# Altium PCB PCB2.PcbDoc
Units mil, origin at the board's own origin, x right, y up, seen from the top; angles counter-clockwise.
Board outline 2625 x 3875 mil, 2 copper layers (Top Layer, Bottom Layer); 11 components, 17 nets, 64 pads, 0 vias.
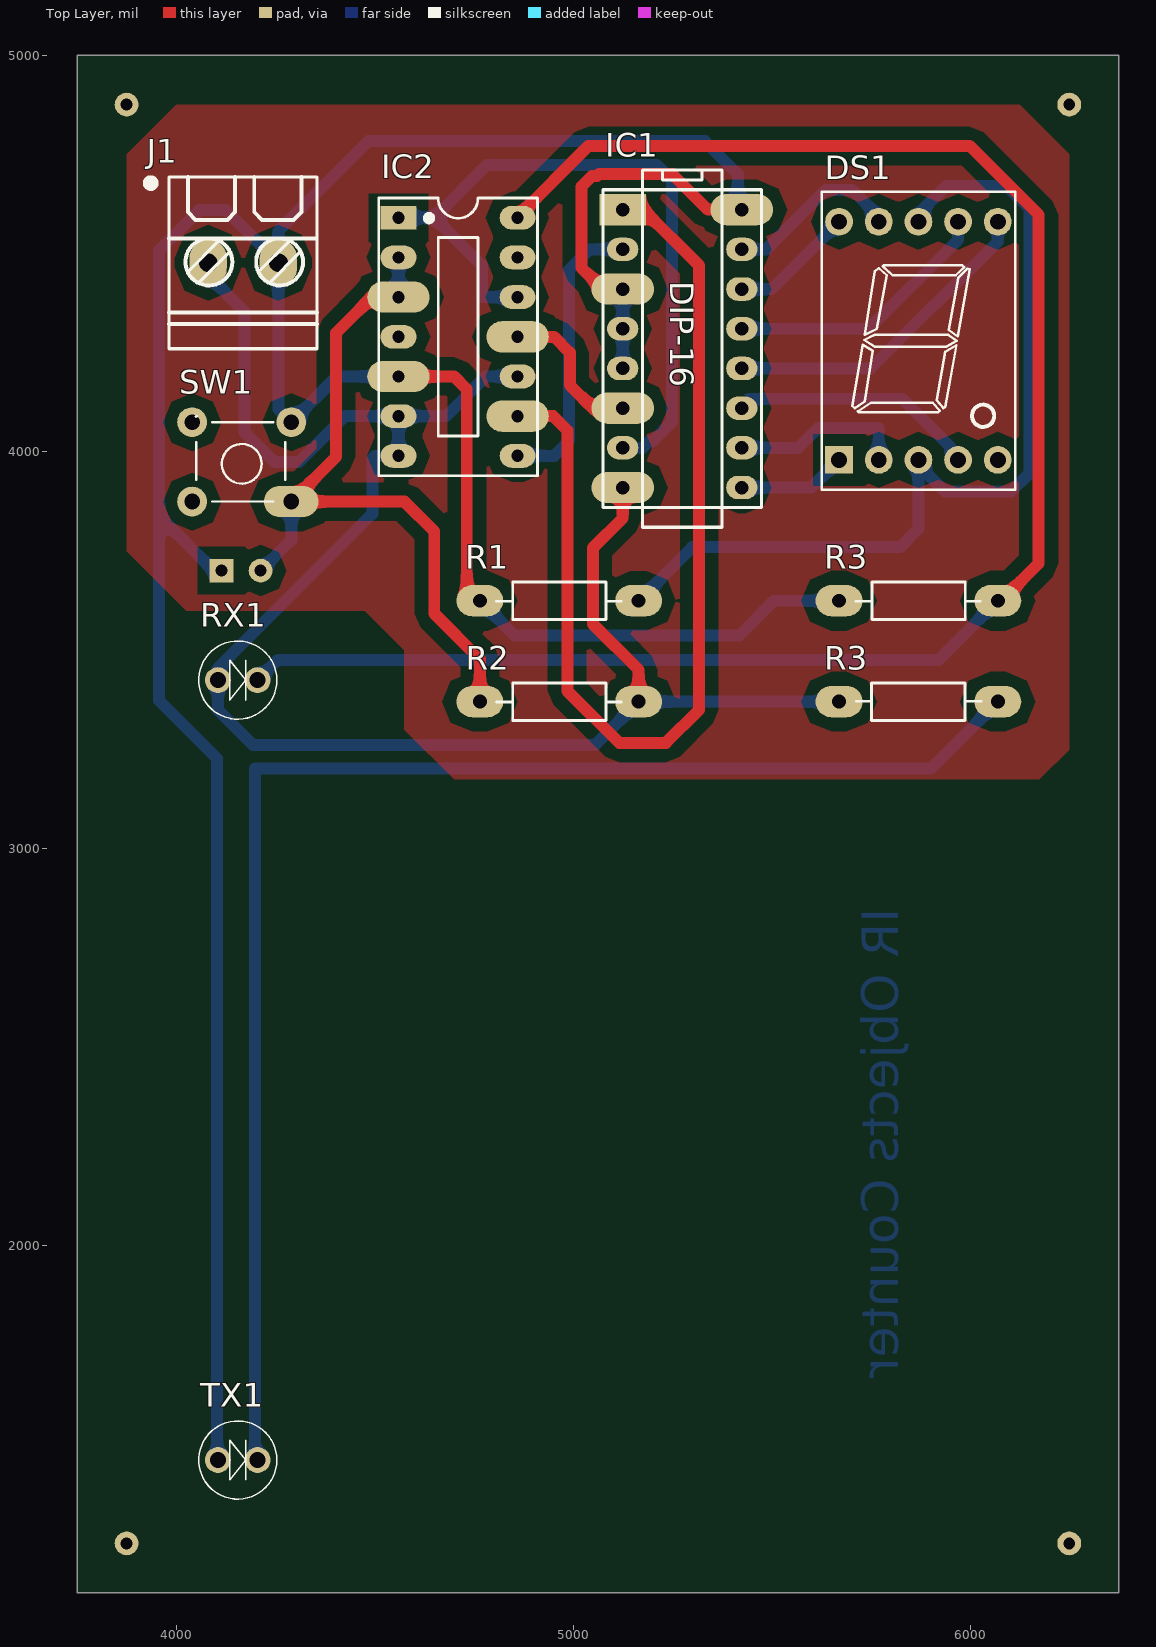
[diagram p0: Top Layer view]
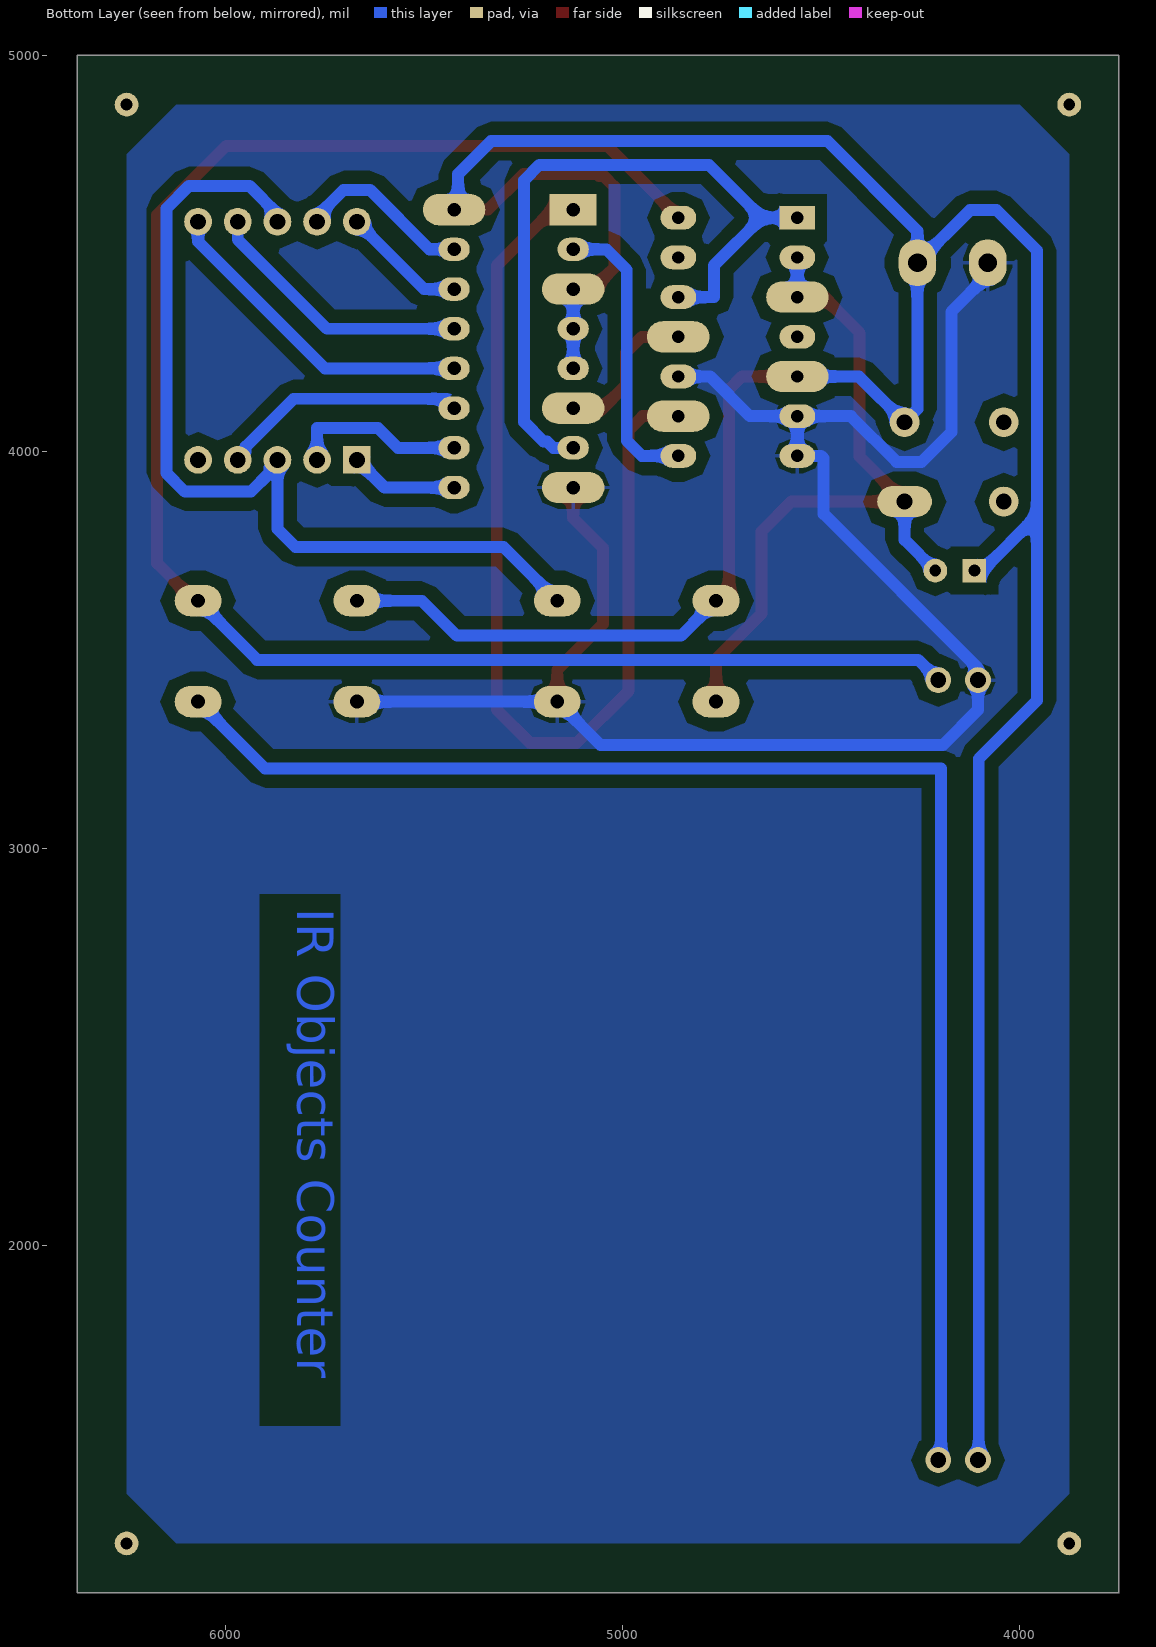
[diagram p1: Bottom Layer view, seen from below]
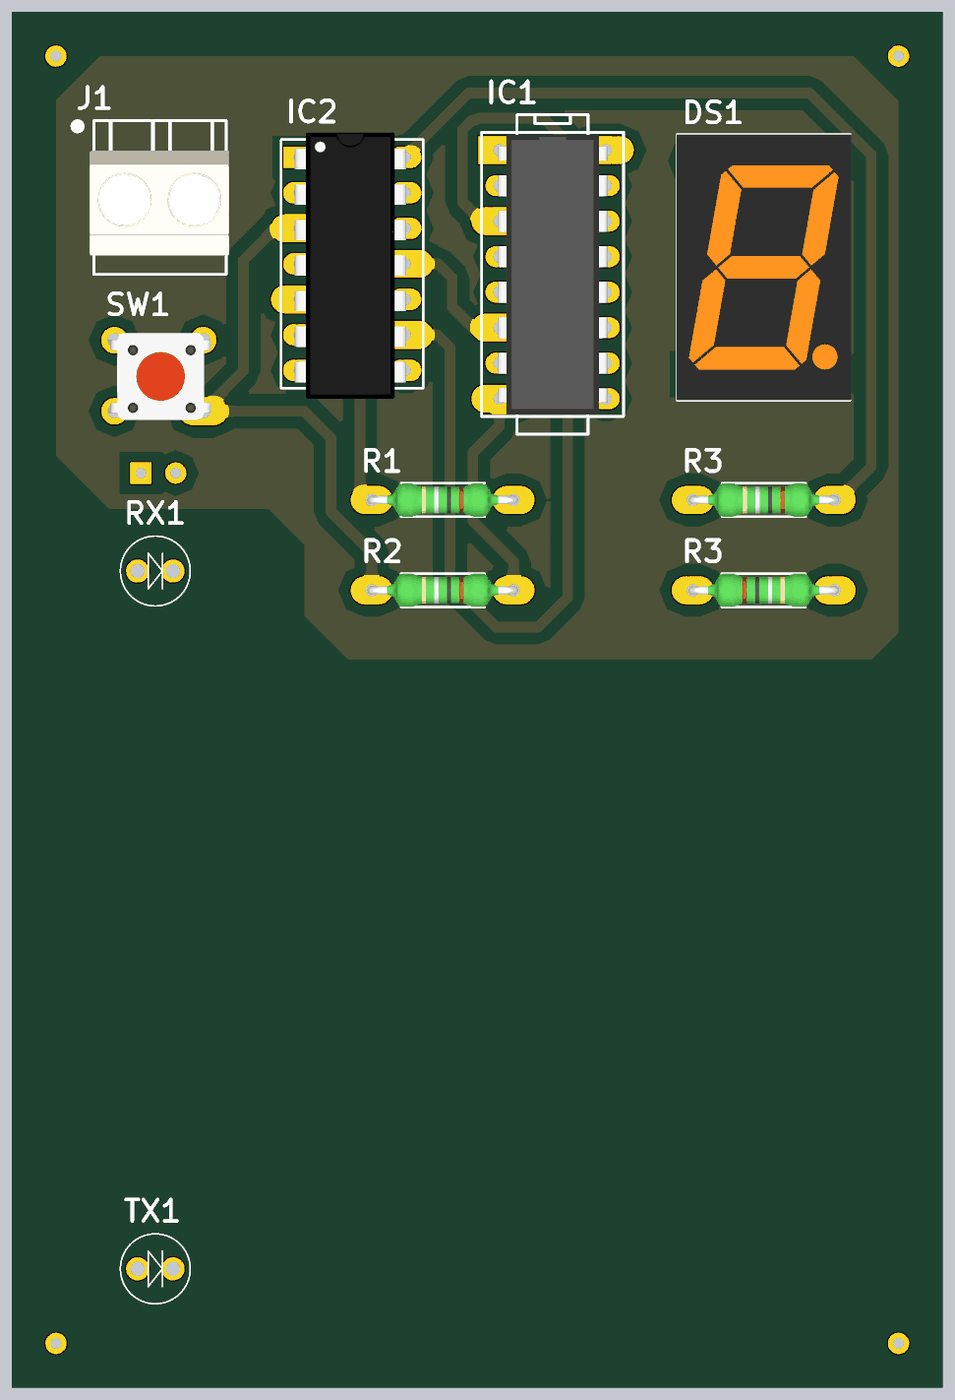
[diagram p2: 3D render of the assembled board from above, using the file's embedded part models]

## Layer stack, top to bottom
Top Solder: solder mask 0.4, Solder Resist, Dk 3.5
Top Layer: signal copper 1.4
Dielectric 1: dielectric 12.6, FR-4, Dk 4.8
Bottom Layer: signal copper 1.4
Bottom Solder: solder mask 0.4, Solder Resist, Dk 3.5

## Board outline
3750,1125 6375,1125 6375,5000 3750,5000

## Design rules (kind name [scope] priority, off if disabled: settings)
Clearance [All] p1: gap=30
PolygonConnect [All] p1: connectstyle=Relief reliefconductorwidth=10 reliefentries=4 polygonreliefangle="90 Angle" airgapwidth=10
RoutingVias [All] p1: holewidth=28 width=80 viastyle="Through Hole" minholewidth=28 minwidth=80 maxholewidth=28 maxwidth=80
SolderMaskExpansion [All] p1: expansion=4
Width [All] p1: maxlimit=30 minlimit=20 preferedwidth=30
30 further rules are at their usual default settings.

## Classes and differential pairs
component class Sheet1: DS1 IC1 IC2 J1 R1 R2 R3 RX1 SW1 TX1

## Components (designator, comment, footprint, x,y, rotation, side; value= is the part's Value field where it differs from the comment)
DS1 "7SEG" LED7SEG-1-0.56 5865,4255 r0 top
IC1 "7447" DIP16 5275,4260 r270 top
IC2 "7490" DIP14 4560,4590 r270 top
J1 "CON.Domino2" "Domino 2M" 4355,4260 r90 top
R1 "1KR" RES-1/4W 4980,3620 r0 top
R2 "1KR" RES-1/4W 4980,3365.74 r0 top
R3 "1KR" RES-1/4W 5885,3620 r0 top
R3 "100R" RES-1/4W 5855,3375.75 r180 top
RX1 "LED" LED-5MM-BLUE 4105,3425 r0 top
SW1 "SW" SW2-DIP 4290,3875 r180 top
TX1 "LED" LED-5MM-WHITE 4105,1460 r0 top

## Footprints (in the part's own frame and the unit in brackets; to place one, negate y for a bottom-side part, rotate by r counter-clockwise, add the part's x,y. Pads: shape width x height; smd on the part's side, far side on the other; paste and mask are expansions set on the pad)
DIP14 [mil] "DIP, 14-Leads, Row Spacing 7.62mm, Pitch 2.54mm, Body 19.2x6.6mm"
  rect 60x90 hole 31: 1(0,0)
  oval 60x90 hole 31: 2(100,0) 4(300,0) 6(500,0) 7(600,0) 8(600,300) 10(400,300) 12(200,300) 13(100,300) 14(0,300)
  oval 78.74x157.48 hole 31: 3(200,0) 5(400,0) 9(500,300) 11(300,300)
  silkscreen extent -50,-50 650,350, body extent -70,-12 680,302, height 145
DIP16 [mm]
  rect 2x3 hole 0.864: 1(-8.897,-3.812)
  oval 1.5x2 hole 0.864: 2(-6.357,-3.812) 4(-1.277,-3.812) 5(1.263,-3.812) 7(6.343,-3.812) 9(8.883,3.808) 10(6.343,3.808) 11(3.803,3.808) 12(1.263,3.808) 13(-1.277,3.808) 14(-3.817,3.808) 15(-6.357,3.808)
  oval 2x4 hole 0.864: 3(-3.817,-3.812) 6(3.803,-3.812) 8(8.883,-3.812) 16(-8.897,3.808)
  silkscreen extent -11.44,-5.08 11.42,5.08, body extent -10,-3.93 10,3.94, height 1.99
"Domino 2M" [mm]
  oval 3x2.4 hole 1.2: 1(5.5,6.975) 2(5.5,2.475)
  silkscreen extent 0,0 11,10.9, body extent 1.35,-0.22 8.85,9.78, height 10
LED7SEG-1-0.56 [mil]
  rect 70x70 hole 40: 1(-195,-275)
  round 70 hole 40: 2(-95,-275) 3(5,-275) 4(105,-275) 5(205,-275) 6(205,325) 7(105,325) 8(5,325) 9(-95,325) 10(-195,325)
  silkscreen extent -239,-350 249,400, body extent -241,-349 251,399, height 315
LED-5MM-BLUE [mil]
  round 65 hole 40: 1(0,0) 2(100,0)
  silkscreen extent -48,-98 148,98, body extent -54,-105 155,105, height 370
LED-5MM-WHITE [mil]
  round 65 hole 40: 1(0,0) 2(100,0)
  silkscreen extent -48,-98 148,98, body extent -54,-105 155,105, height 370
RES-1/4W [mil]
  oval 118.11x78.74 hole 35: 1(-215,5) 2(185,5)
  silkscreen extent -173,-42 141,52, body extent -227,-42 197,52, height 95
SW2-DIP [mm] "SW button 4pin, 250 x250 mil"
  oval 3.5x2 hole 1: 1(0,0)
  round 1.905 hole 1: 2(0,-5.08) 3(6.35,-5.08) 4(6.35,0)
  silkscreen extent 0.38,-5.46 6.1,0, body extent -0.9,-5.59 7,0.61, height 7

## Part data
DS1: library part LED7SEG-1, "14.2 mm General Purpose Blue 7-Segment Display: CC, RH DP, Gray Surface"
IC1: "BCD to 7-Segment Decoder/Driver"
IC2: "4-Bit Decade Counter"
J1: "2 pins Domino Header"
R1 R2 R3 R3: library part Res, "Res"
RX1 TX1: "LED Single colour Green and Red"
SW1: library part SW4, "Switch button 4 pin"

## Free pads (board coordinates)
  round 60 hole 30: 0(3875,4875) 1(3875,1250) 1(4212.6,3700.79) 2(6250,1250) 3(6250,4875)
  rect 60x60 hole 30: 0(4114.17,3700.79)

## Nets (pads, with @x,y where several pads share a name; then routed paths per layer and width w, separated by ;. In a path a pad name is that pad's centre, name@x,y a point inside that pad or via, vN(x,y) a via of type N, cw(c..) or ccw(c..) an arc to the next point about the centre after c; other vN are vias at no path point)
GND: IC1.8 IC2.6 IC2.7 IC2.10 J1.1 R2.2 R3.2@5670,3370.75 RX1.1 | length 4500.9
  Top Layer w30: IC1.8 5124.92,3833 5050,3758.08 5050,3566 5165,3451 R2.2
  Bottom Layer w30: J1.1 4080.39,4444.61 4172,4353 4172,4050 4247,3975 4310,3975 4425,4090 IC2.6 ; IC2.10 4780,4190 4680,4090 IC2.6 ; R3.2@5670,3370.75 5417.01,3370.75 R2.2 5056.26,3262 4193,3262 4105,3350 RX1.1 4105,3455 4494,3844 4494,3984 4500,3990 IC2.7 IC2.6
NetDS1_1: DS1.1 IC1.9 | length 273.9
  Bottom Layer w30: IC1.9 5600.29,3910.29 DS1.1
NetDS1_2: DS1.2 IC1.10 | length 445.7
  Bottom Layer w30: IC1.10 5566.65,4010.29 5616.36,4060 5770,4060 DS1.2
NetDS1_3: DS1.3 DS1.8 R1.2 | length 2313
  Bottom Layer w30: R1.2 5300,3760 5824,3760 5870,3806 DS1.3 5890,3960 5890,3946.86 5936.86,3900 6103.14,3900 6150,3946.86 6150,4613.14 6093.14,4670 5940,4670 5870,4600 DS1.8
NetDS1_4: DS1.4 IC1.11 | length 598.1
  Bottom Layer w30: IC1.11 5448.63,4134 5829.14,4134 5950,4013.14 DS1.4@5950,4000
NetDS1_6: DS1.6 IC1.12 | length 827.5
  Bottom Layer w30: IC1.12 5750.29,4210.29 6070,4530 DS1.6
NetDS1_7: DS1.7 IC1.13 | length 683.2
  Bottom Layer w30: IC1.13 5745.29,4310.29 5970,4535 DS1.7
NetDS1_9: DS1.9 IC1.15 | length 447.9
  Bottom Layer w30: IC1.15 5487.16,4510.29 5636.86,4660 5703.14,4660 5770,4593.14 DS1.9
NetDS1_10: DS1.10 IC1.14 | length 315.4
  Bottom Layer w30: IC1.14 5500.29,4410.29 DS1.10
NetIC1_1: IC1.1 IC2.9 | length 2587.9
  Top Layer w30: IC2.9 4950,4090 4985.34,4054.66 4985.34,3397.66 5116.32,3266.68 5233.68,3266.68 5317.34,3350.34 5317.34,4469.66 5176.71,4610.29 IC1.1
NetIC1_2: IC1.2 IC2.8 | length 732.9
  Bottom Layer w30: IC2.8 4952,3990 4990,4028 4990,4459 5041.29,4510.29 IC1.2
NetIC1_6: IC1.6 IC2.11 | length 387.2
  Top Layer w30: IC2.11 4952,4290 4992,4250 4992,4168.29 5050,4110.29 IC1.6
NetIC1_7: IC1.7 IC2.1 IC2.12 | length 1859.2
  Bottom Layer w30: IC2.1 4650,4590 ; IC2.12 4770,4390 4770,4470 4650,4590 ; IC1.7 5175,4010.29 5190.63,4025.92 5199.24,4025.92 5248.66,4075.35 5248.66,4684.34 5210,4723 4783,4723 4650,4590
NetIC2_2: IC2.2 IC2.3 pad.1@4212.6,3700.79 R2.1 SW1.1 | length 1840.3
  Top Layer w30: IC2.3 4493,4390 4403,4300 4403,3988 SW1.1 4575,3875 4650,3800 4650,3592.84 4765,3477.84 R2.1
  Bottom Layer w30: pad.1@4212.6,3700.79 4290,3778.19 SW1.1 ; IC2.3 IC2.2
NetIC2_14: IC2.14 R3.2@6070,3625 RX1.2 | length 4429.2
  Top Layer w30: IC2.14 4860,4592.29 5038.71,4771 5999,4771 6173,4597 6173,3719 6079,3625 R3.2@6070,3625
  Bottom Layer w30: RX1.2 4256,3476 5921,3476 R3.2@6070,3625
NetR3_1: R3.1@6070,3370.75 TX1.2 | length 3686.8
  Bottom Layer w30: TX1.2 4198,1467 4198,3202 5901.25,3202 R3.1@6070,3370.75
VCC: IC1.3 IC1.4 IC1.5 IC1.16 IC2.5 J1.2 pad.0@4114.17,3700.79 R1.1 R3.1@5670,3625 SW1.2 TX1.1 | length 8613.9
  Top Layer w30: IC2.5 4700,4190 4732,4158 4732,3658 R1.1 ; IC1.3 5075,4410.29 5020.87,4464.43 5020.87,4668.3 5047.23,4694.66 5059.66,4694.66 5065,4700 5250,4700 5339.71,4610.29 IC1.16
  Bottom Layer w30: 3956.69,3838.58 4094.49,3700.79 pad.0@4114.17,3700.79 ; TX1.1 4103,1462 4103,3227 3956.69,3373.31 3956.69,4507.87 4057.82,4609 4125.1,4609 J1.2 ; IC2.5 4405,4190 SW1.2 4257.56,4107.44 J1.2 ; R1.1 4853,3537 5418,3537 5506,3625 R3.1@5670,3625 ; IC1.5 IC1.4 IC1.3 ; IC1.16 5415,4610.29 5415,4700 5332,4783 4484,4783 4257.56,4556.56 J1.2
pads on no net: DS1.5 IC2.4 IC2.13 SW1.3 SW1.4

## Polygon pours and split planes (outlines as drawn)
GND on Bottom Layer "Mechanical 1-No Net" (solid, pour order 4): 3875,4750 4000,4875 6125,4875 6250,4750 6250,1375 6125,1250 4000,1250 3875,1375 3875,4750
no net on Top Layer "Mechanical 1-No Net" (solid, pour order 8): 3875,4750 4000,4875 6125,4875 6250,4750 6250,3275 6250,3250 6175,3175 4700,3175 4575,3300 4575,3500 4475,3600 4025,3600 3875,3750 3875,4750

## Other copper
Bottom Layer:
  text "IR Objects Counter" at 5850,2850 h157.48 r90

## Text inside footprints (layer, text, board x,y; h text height)
IC1: Top Overlay "DIP-16" at 5244.92,4430.29 h59.05 r270